# Altium PCB PCB1.PcbDoc
Units mm, origin at the board's own origin, x right, y up, seen from the top; angles counter-clockwise.
Board outline 91.95 x 79.76 mm, 2 copper layers (Top Layer, Bottom Layer); 60 components, 32 nets, 196 pads, 47 vias.
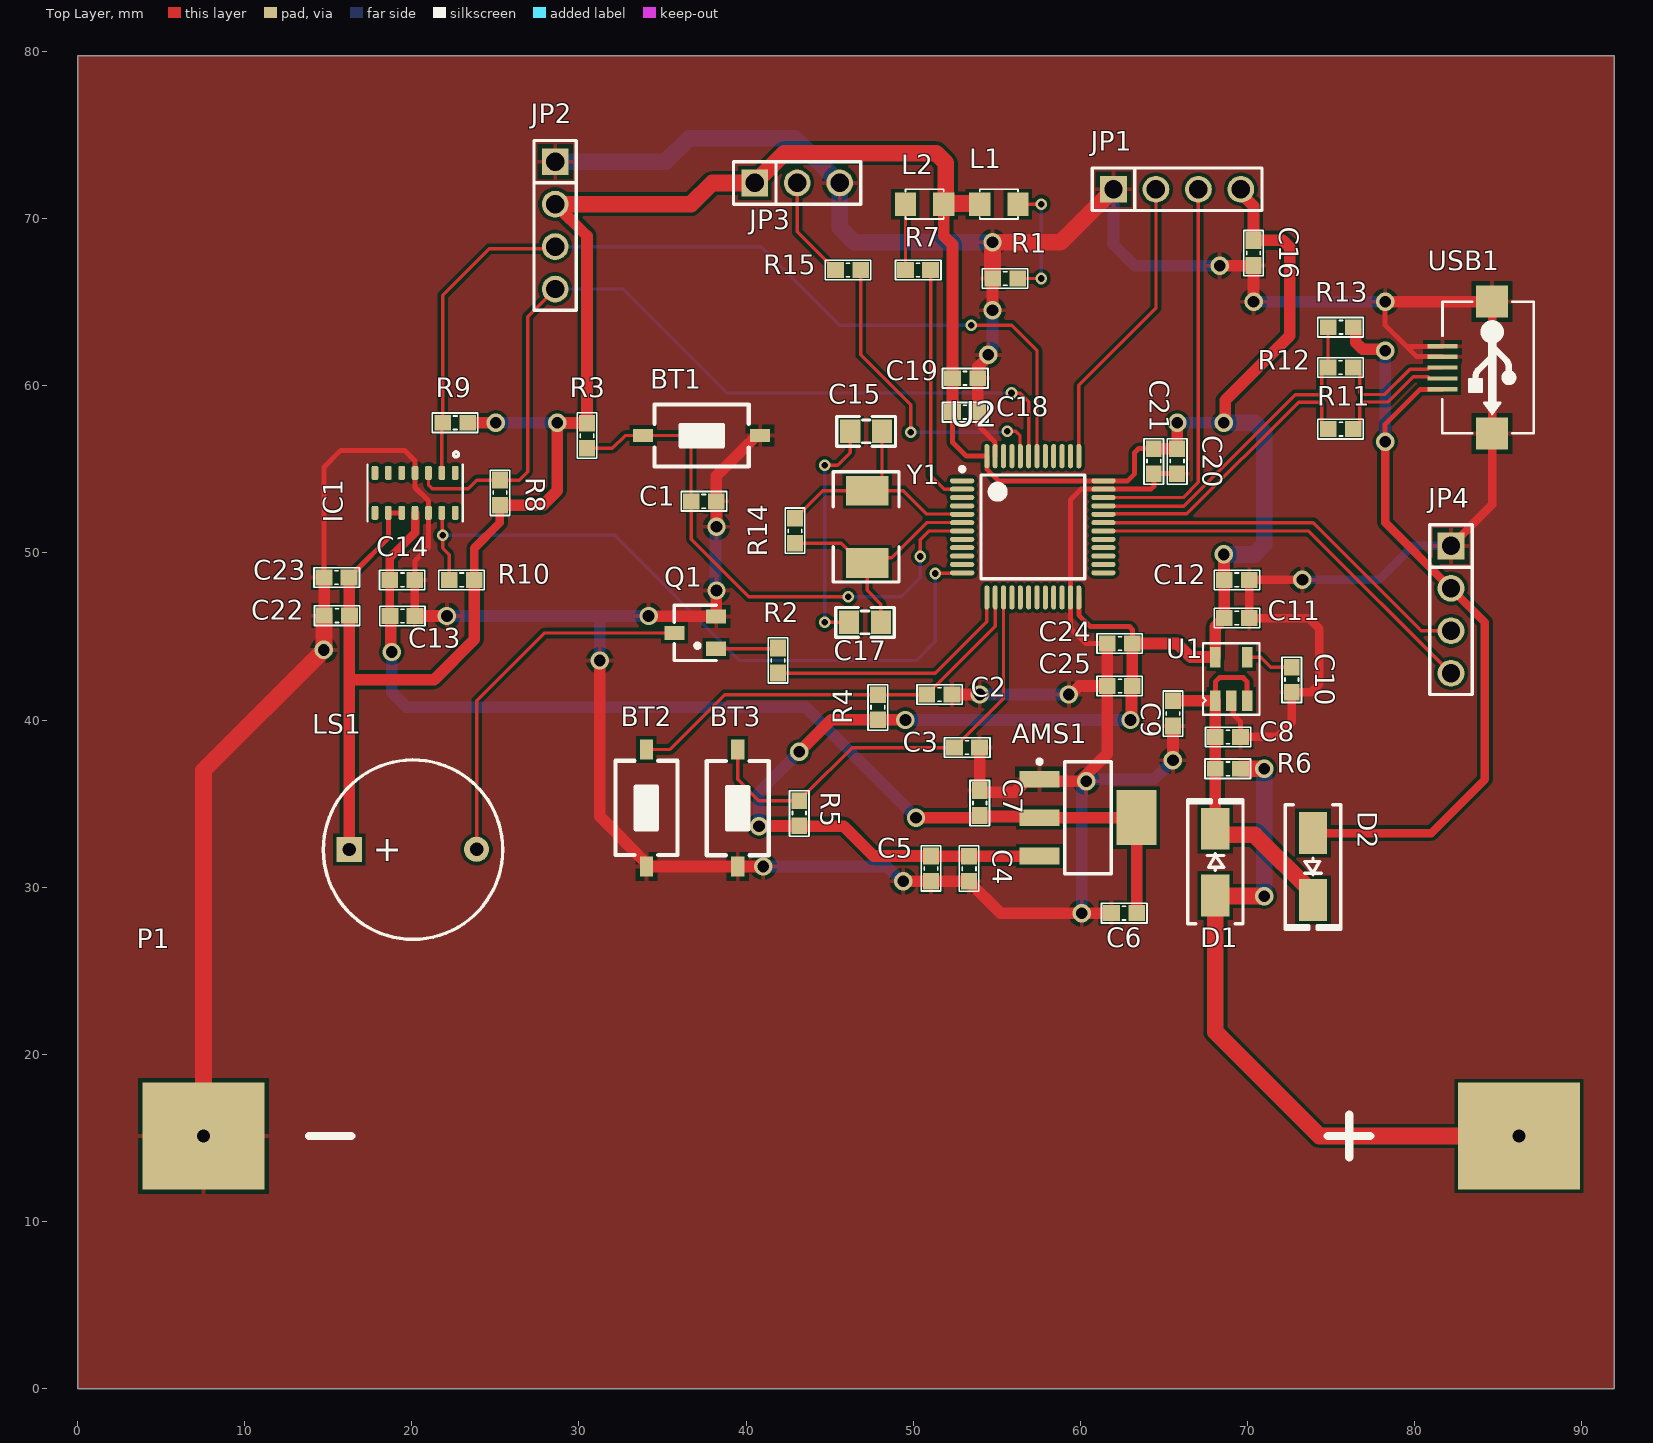
[diagram p0: Top Layer view]
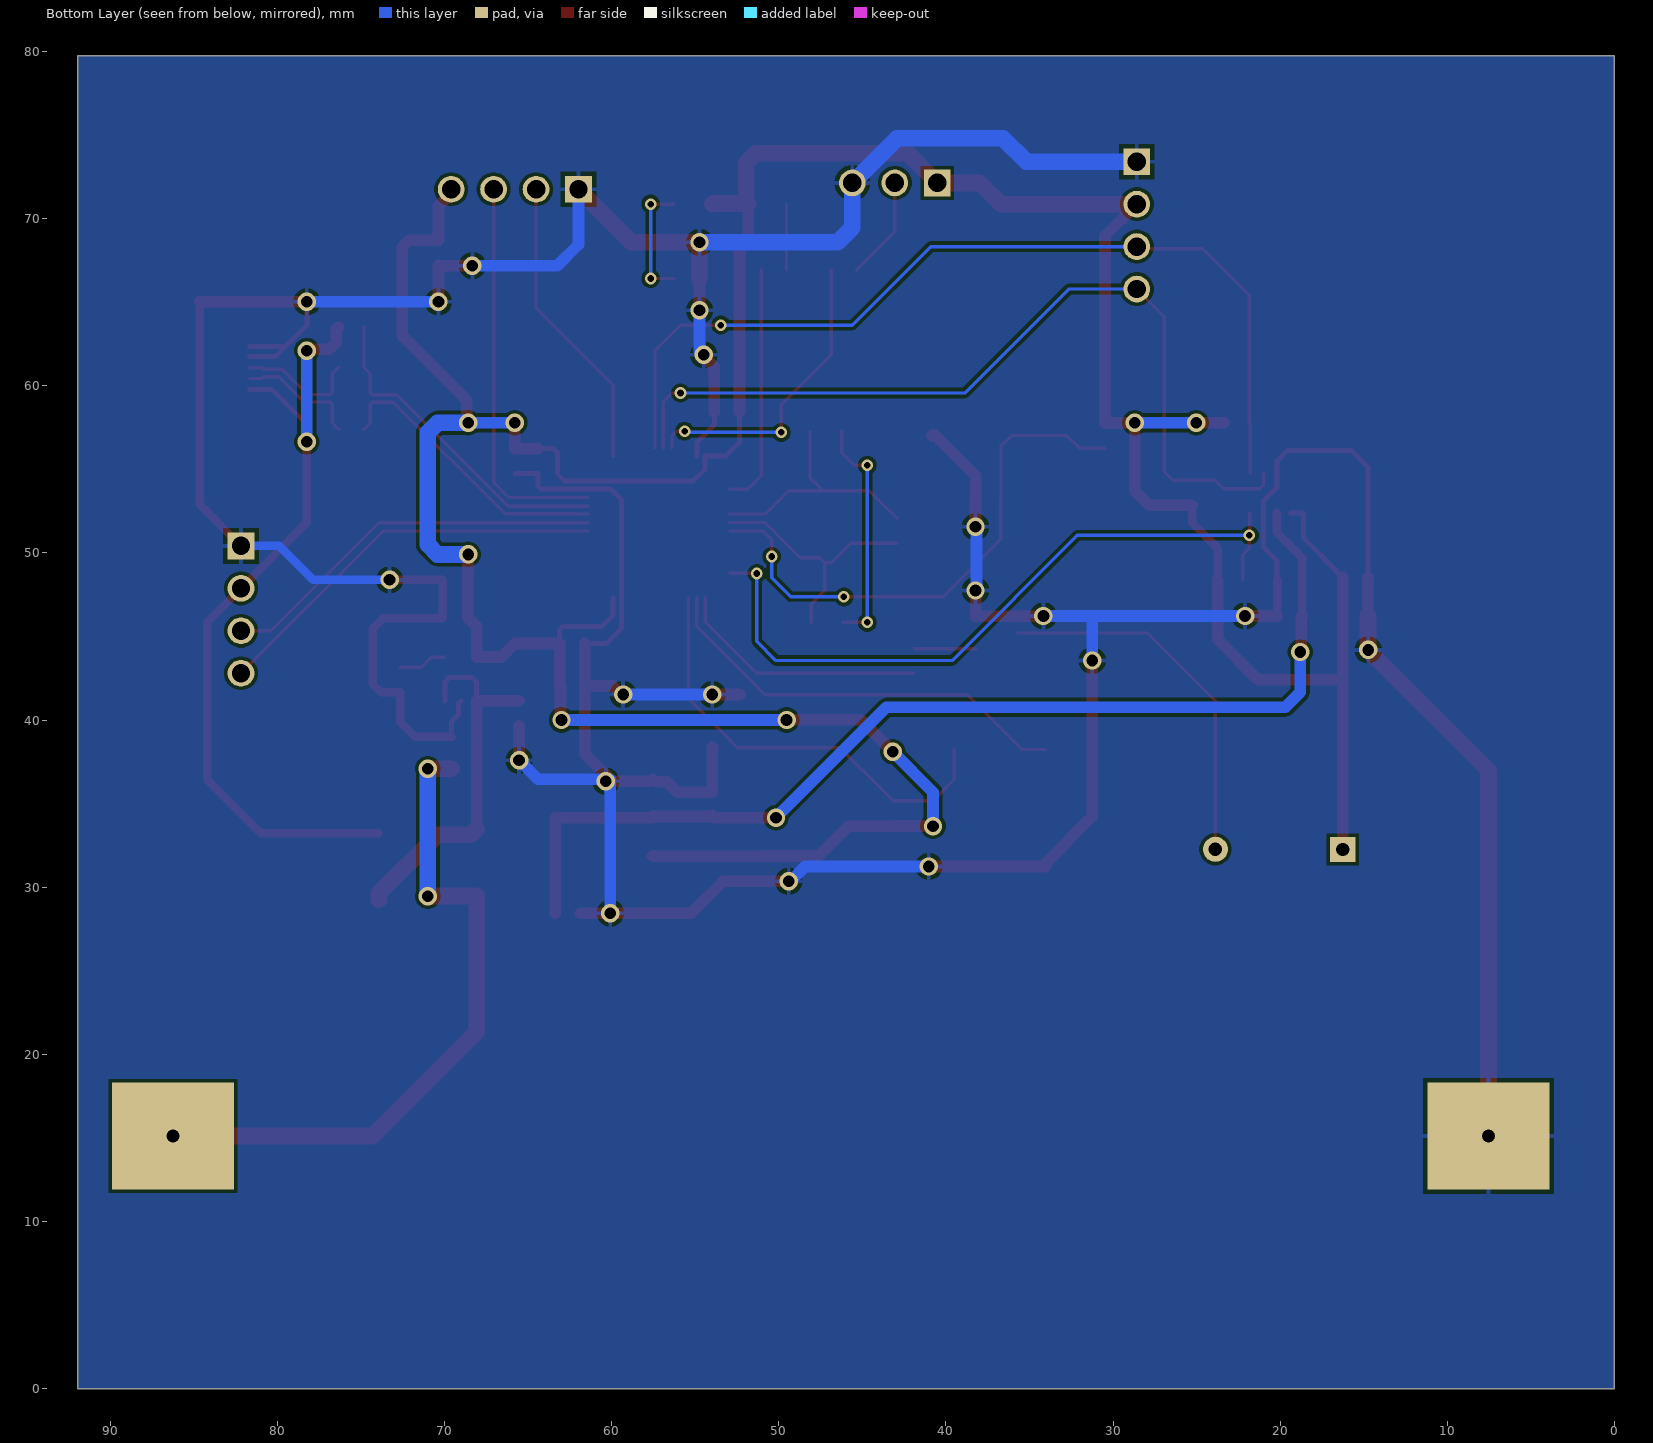
[diagram p1: Bottom Layer view, seen from below]
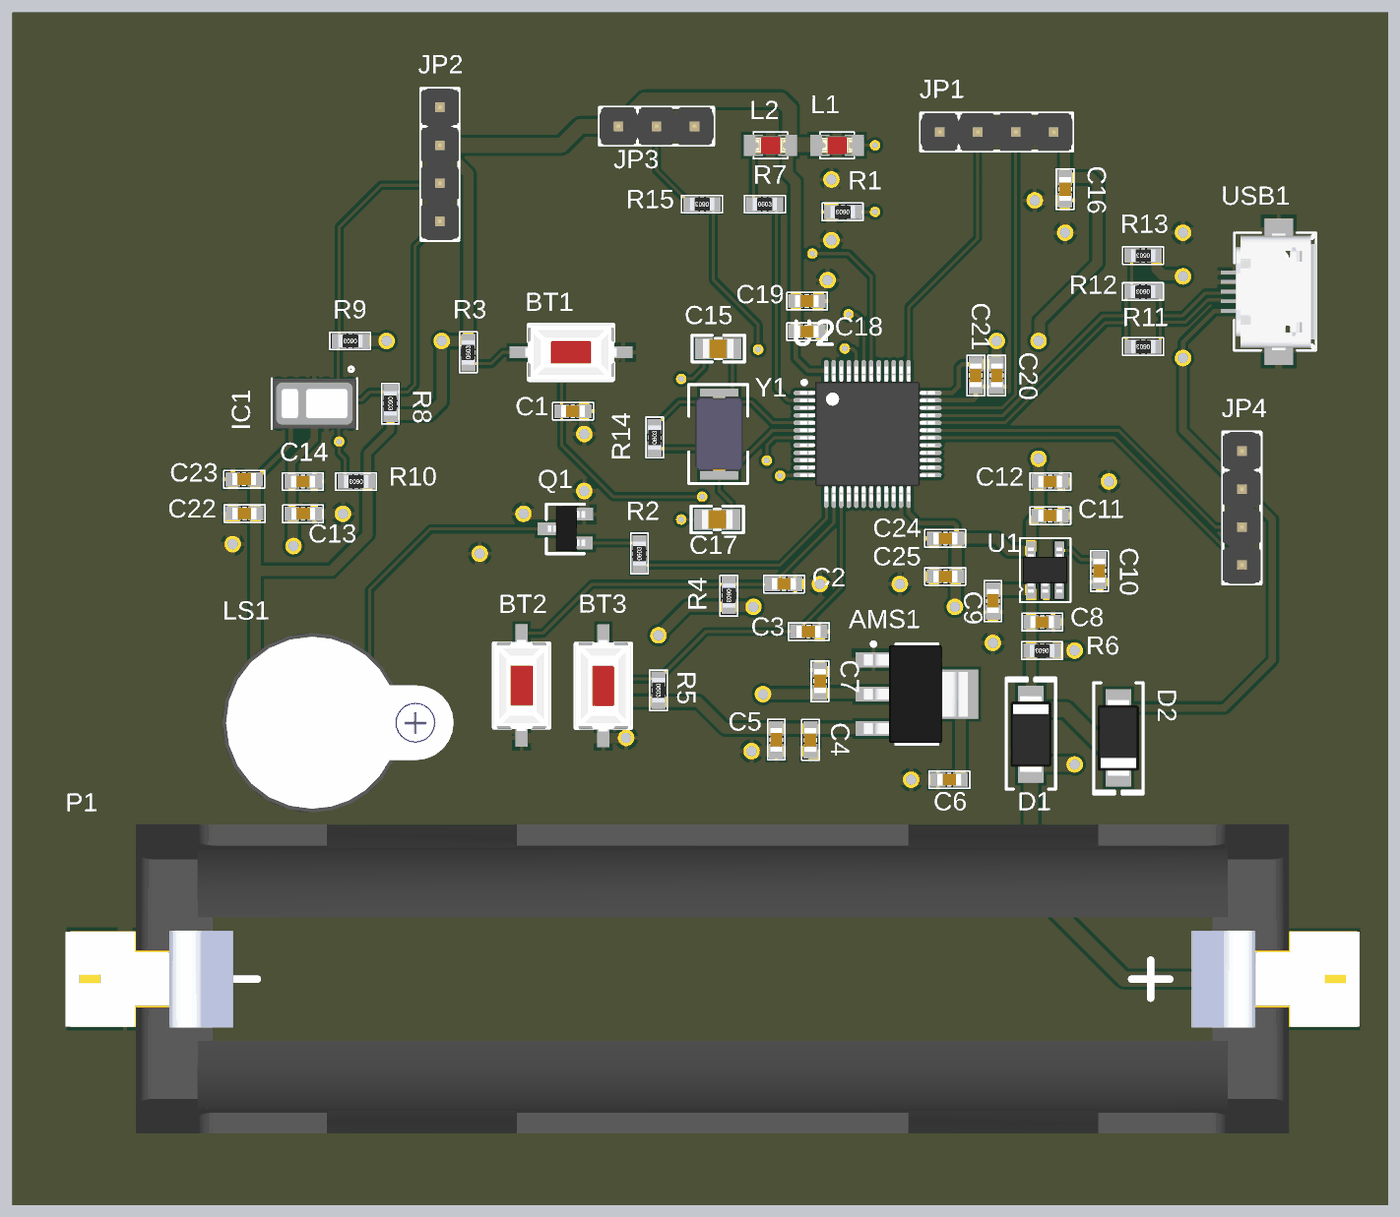
[diagram p2: 3D render of the assembled board from above, using the file's embedded part models]

## Layer stack, top to bottom
Top Solder: solder mask 0.0102, Solder Resist, Dk 3.5
Top Layer: signal copper 0.0356
Dielectric 1: dielectric 0.32, FR-4, Dk 4.8
Bottom Layer: signal copper 0.0356
Bottom Solder: solder mask 0.0102, Solder Resist, Dk 3.5

## Board outline
0,0 0,79.756 91.948,79.756 91.948,0

## Design rules (kind name [scope] priority, off if disabled: settings)
Clearance Clearance_1 [All] p1: gap=0.2 ignorepadtopadclearanceinfootprint=FALSE
DiffPairsRouting [All] p1: maxlimit=0.254 minlimit=0.254 mostfreqgap=0.254 toplayer_minwidth=0.2 toplayer_maxwidth=0.2 toplayer_prefwidth=0.2 bottomlayer_minwidth=0.2 bottomlayer_maxwidth=0.2 bottomlayer_prefwidth=0.2 maxuncoupledlength=12.7
PolygonConnect [All] p1: connectstyle=Relief reliefconductorwidth=0.254 reliefentries=4 polygonreliefangle="90 Angle" airgapwidth=0.254
RoutingVias RoutingVias_Power [InNetClass('Power')] p1: holewidth=0.7 width=1.1 viastyle="Through Hole" minholewidth=0.7 minwidth=1.1 maxholewidth=0.7 maxwidth=1.1
RoutingVias RoutingVias_Signal [All] p2: holewidth=0.4 width=0.7 viastyle="Through Hole" minholewidth=0.4 minwidth=0.7 maxholewidth=0.4 maxwidth=0.7
SolderMaskExpansion [All] p1: expansion=0 istentingtop=FALSE soldermaskfromhole=TRUE
Width Width_Power [InNetClass('Power')] p1: maxlimit=1 minlimit=0.3 preferedwidth=0.7
Width Width_Signal [All] p2: maxlimit=0.2 minlimit=0.2 preferedwidth=0.2
29 further rules are at their usual default settings.

## Classes and differential pairs
net class Power: 5V GND NetD2_1 VCC1V8 VCC3V3 VIN
differential pair USB: +USB_P -USB_N
differential pair USB_D: +USB_D_P -USB_D_N

## Components (designator, comment, footprint, x,y, rotation, side; value= is the part's Value field where it differs from the comment)
AMS1 "AMS1117" SOT223 60.452,34.163 r270 top value="AMS1117-3.3V SOT223"
BT1 "Nut Nhan 2 Chan SMD 3x6x2.5" "Nut Nhan 2 Chan SMD 3x6x2.5" 37.338,57.023 r180 top
BT2 "Nut Nhan 2 Chan SMD 3x6x2.5" "Nut Nhan 2 Chan SMD 3x6x2.5" 34.036,34.742 r90 top
BT3 "Nut Nhan 2 Chan SMD 3x6x2.5" "Nut Nhan 2 Chan SMD 3x6x2.5" 39.497,34.727 r90 top
C1 "105" "tu 0603" 37.465,53.086 r0 top
C2 "105" "tu 0603" 51.562,41.529 r0 top
C3 "105" "tu 0603" 53.213,38.354 r0 top
C4 "104" "tu 0603" 53.34,31.103 r90 top
C5 "106" "tu 0603" 51.054,31.115 r90 top
C6 "104" "tu 0603" 62.611,28.448 r0 top
C7 "106" "tu 0603" 53.975,35.04 r270 top
C8 "105" "tu 0603" 68.822,38.989 r0 top
C9 "104" "tu 0603" 65.532,40.398 r270 top
C10 "22pF" "tu 0603" 72.644,42.418 r270 top
C11 "106" "tu 0603" 69.354,46.101 r0 top
C12 "104" "tu 0603" 69.354,48.387 r0 top
C13 "106" "tu 0603" 19.443,46.228 r180 top
C14 "104" "tu 0603" 19.431,48.387 r180 top
C15 "20pF" "tu 0805" 47.182,57.274 r180 top
C16 "104" "tu 0603" 70.358,67.945 r270 top
C17 "20pF" "tu 0805" 47.117,45.847 r180 top
C18 "104" "tu 0603" 53.098,58.42 r0 top
C19 "104" "tu 0603" 53.098,60.452 r0 top
C20 "104" "tu 0603" 65.786,55.487 r270 top
C21 "104" "tu 0603" 64.389,55.487 r270 top
C22 "104" "tu 0603" 15.518,46.247 r0 top
C23 "106" "tu 0603" 15.494,48.533 r0 top
C24 "104" "tu 0603" 62.357,44.577 r180 top
C25 "104" "tu 0603" 62.357,42.037 r180 top
D1 "M7" "DIODE SMA" 73.914,31.242 r270 top
D2 "M7" "DIODE SMA" 68.072,31.496 r90 top
IC1 "MAX30102" Max30102 20.32,53.721 r270 top
JP1 "SWD" "JP 1x4 DT" 61.976,71.755 r0 top
JP2 "LCD OLED" "JP 1x4 DT" 28.575,73.406 r270 top
JP3 "JP 1x3 2.54" "JP 1x3 DT" 40.513,72.136 r0 top
JP4 "ESP8266" "JP 1x4 DT" 82.169,50.419 r270 top
L1 "LED 0805" LED-0805-Red 53.975,70.866 r0 top
L2 "LED 0805" LED-0805-Red 51.816,70.866 r180 top
LS1 "Coi Chip Speaker" "Coi Chip Speacker" 16.256,32.258 r0 top
P1 "Lithium 18650" 18650_Lithium 86.233,15.113 r180 top
Q1 "HF" SOT-23 36.957,45.212 r90 top value=C9014
R1 "510R" "tro smd 0603" 55.499,66.421 r180 top
R2 "4.7k" "tro smd 0603" 41.91,43.561 r90 top
R3 "10k" "tro smd 0603" 30.48,57.011 r90 top
R4 "10k" "tro smd 0603" 47.879,40.767 r270 top
R5 "10k" "tro smd 0603" 43.18,34.429 r270 top
R6 "1k" "tro smd 0603" 68.822,37.084 r180 top
R7 "510R" "tro smd 0603" 50.28,66.929 r0 top
R8 "1k" "tro smd 0603" 25.273,53.606 r270 top
R9 "1k" "tro smd 0603" 22.594,57.785 r180 top
R10 "1k" "tro smd 0603" 22.987,48.387 r180 top
R11 "20R" "tro smd 0603" 75.577,57.404 r180 top
R12 "20R" "tro smd 0603" 75.565,61.087 r180 top
R13 "4.7k" "tro smd 0603" 75.577,63.5 r180 top
R14 "1M" "tro smd 0603" 42.926,51.32 r90 top
R15 "100k" "tro smd 0603" 46.101,66.929 r180 top
U1 "RT9193-33GB" SOT23-5 69.025,42.458 r0 top
U2 "STM32F103xx_LQFP48" STM32_LQPF48 57.15,51.562 r0 top
USB1 "USB Micro 5p SMD" "USB Micro 5p SMD" 81.661,61.087 r270 top
Y1 "8Mhz" "Thach Anh 2 chan SMD5032" 47.244,51.562 r90 top value=4Mhz

## Footprints (in the part's own frame and the unit in brackets; to place one, negate y for a bottom-side part, rotate by r counter-clockwise, add the part's x,y. Pads: shape width x height; smd on the part's side, far side on the other; paste and mask are expansions set on the pad)
18650_Lithium [mm]
  rect 7.3x6.4 hole 0.762: 1(0,0) 2(78.7,0)
  silkscreen extent 8.89,-1.27 72.39,1.27, body extent -3.79,-10.33 82.67,10.32, height 14.86
"Coi Chip Speacker" [mm]
  rect 1.5x1.5 hole 0.8: 1(0,0)
  round 1.5 hole 0.8: 2(7.62,0.013)
  silkscreen extent -1.55,-5.38 9.18,5.36, body extent -2.22,-6 13.24,6, height 4.5
"DIODE SMA" [mm] "SMA"
  rect 2.5x1.7 smd: 1(-2,0) 2(2,0)
  silkscreen extent -3.68,-1.65 3.75,1.65, body extent -2.6,-1.37 2.6,1.37, height 2.4
"JP 1x3 DT" [mm]
  rect 1.6x1.6 hole 1.1: 1(0,0)
  round 1.6 hole 1.1: 2(2.54,0) 3(5.08,0)
  silkscreen extent -1.27,-1.27 6.35,1.27, body extent -1.27,-1.27 6.35,1.27, height 8.54
"JP 1x4 DT" [mm] "4 pins, 1 row, straight, gold plating"
  rect 1.6x1.6 hole 1.1: 1(0,0)
  round 1.6 hole 1.1: 2(2.54,0) 3(5.08,0) 4(7.62,0)
  silkscreen extent -1.27,-1.27 8.89,1.27, body extent -1.27,-1.27 8.89,1.27, height 8.54
LED-0805-Red [mil]
  rect 50x55 smd: 1(0,0) 2(90,0)
  silkscreen extent 0,-35 90,35, body extent 5,-25 85,25, height 43
Max30102 [mm]
  rrect50% 0.84x0.4 smd: 1(-1.068,2.273) 2(-1.068,1.473) 3(-1.068,0.673) 4(-1.068,-0.127) 5(-1.068,-0.927) 6(-1.068,-1.727) 7(-1.068,-2.527) 8(1.322,-2.527) 9(1.322,-1.727) 10(1.322,-0.927) 11(1.322,-0.127) 12(1.322,0.673) 13(1.322,1.473) 14(1.322,2.273)
  silkscreen extent -2.32,-2.98 1.83,2.72, body extent -1.52,-2.93 1.78,2.67, height 1.65
"Nut Nhan 2 Chan SMD 3x6x2.5" [mm] "Switch SMD type"
  rect 1.2x0.8 smd: 1(-3.5,0) 2(3.5,0)
  silkscreen extent -2.82,-1.85 2.82,1.85, body extent -3.05,-1.85 3.05,1.85, height 2.5
SOT23-5 [mm] "CASE: SOT"
  rect 0.62x1.22 smd mask+0.076: 1(-0.953,-1.31) 2(-0.003,-1.31) 3(0.947,-1.31) 4(0.952,1.31) 5(-0.953,1.31)
  silkscreen extent -1.69,-2.14 1.69,2.14, body extent -1.5,-1.5 1.5,1.5, height 1.41
SOT223 [mm]
  rect 1x2.4 smd: 1(-2.3,-2.9) 2(0,-2.9) 3(2.3,-2.9)
  rect 3.3x2.4 smd: 4(0,2.9)
  silkscreen extent -3.47,-3.02 3.35,1.4, body extent -3.25,-3.56 3.25,3.4, height 1.68
SOT-23 [mm] "SOT 23 _ 1-3-2"
  rect 0.85x1.2 smd: 1(-0.94,-1.245) 2(0.985,-1.25) 3(0.005,1.25)
  silkscreen extent -1.65,-1.27 1.65,1.27, body extent -1.47,-1.33 1.53,1.17, height 1.06
STM32_LQPF48 [mm]
  oval 1.45x0.3 smd: 1(-4.225,2.75) 2(-4.225,2.25) 3(-4.225,1.75) 4(-4.225,1.25) 5(-4.225,0.75) 6(-4.225,0.25) 7(-4.225,-0.25) 8(-4.225,-0.75) 9(-4.225,-1.25) 10(-4.225,-1.75) 11(-4.225,-2.25) 12(-4.225,-2.75) 25(4.225,-2.75) 26(4.225,-2.25) 27(4.225,-1.75) 28(4.225,-1.25) 29(4.225,-0.75) 30(4.225,-0.25) 31(4.225,0.25) 32(4.225,0.75) 33(4.225,1.25) 34(4.225,1.75) 35(4.225,2.25) 36(4.225,2.75)
  oval 0.3x1.45 smd: 13(-2.75,-4.225) 14(-2.25,-4.225) 15(-1.75,-4.225) 16(-1.25,-4.225) 17(-0.75,-4.225) 18(-0.25,-4.225) 19(0.25,-4.225) 20(0.75,-4.225) 21(1.25,-4.225) 22(1.75,-4.225) 23(2.25,-4.225) 24(2.75,-4.225) 37(2.75,4.225) 38(2.25,4.225) 39(1.75,4.225) 40(1.25,4.225) 41(0.75,4.225) 42(0.25,4.225) 43(-0.25,4.225) 44(-0.75,4.225) 45(-1.25,4.225) 46(-1.75,4.225) 47(-2.25,4.225) 48(-2.75,4.225)
  silkscreen extent -4.35,-3.1 3.1,3.57, body extent -4.5,-4.5 4.5,4.5, height 1.6
"Thach Anh 2 chan SMD5032" [mil] "DO-214-AA/SMB; 2 C-Bend Leads; Body 5.3 x 3.6 mm, inc. leads (LxW)"
  rect 70x100 smd: 1(-85,0) 2(85,0)
  silkscreen extent -130,-75 130,80, body extent -98,-63 98,63, height 51
"tro smd 0603" [mm] "Chip Capacitor, 2-Leads, Body 1,60x0,80mm, IPC Medium Density"
  rect 1x0.95 smd mask+0.076: 1(-0.75,0) 2(0.75,0)
  silkscreen extent -1.35,-0.58 1.37,0.58, body extent -0.82,-0.42 0.82,0.43, height 0.44
"tu 0603" [mm] "Chip Capacitor, 2-Leads, Body 1,60x0,80mm, IPC Medium Density"
  rect 1x0.95 smd mask+0.076: 1(-0.75,0) 2(0.75,0)
  silkscreen extent -1.35,-0.58 1.37,0.58, body extent -0.8,-0.4 0.8,0.4, height 0.9
"tu 0805" [mm] "Compoment SMD 80x50mil"
  rect 1.2x1.4 smd: 1(-0.946,-0.003) 2(0.954,-0.003)
  silkscreen extent -1.75,-0.89 1.75,0.89, body extent -1.01,-0.64 1.01,0.63, height 0.61
"USB Micro 5p SMD" [mil]
  rect 10x70 smd: 1(51.18,0) 2(25.59,0) 3(0,0) 4(-25.59,0) 5(-50,0)
  rect 74.8x74.8 smd: 5(-155.51,116.84) 5(155.51,116.84)
  silkscreen extent -155,-1 155,215, body extent -157,5 158,218, height 107

## Part data
AMS1: library part "AMS1117 SMD", "Dán", Chung_Loai=Dán, Don_Vi=Con, Ma_Hang=MH000596
C1 C2 C3: library part "Tu 0603 105 50V 10%", "Dán", Chung_Loai=Dán, Don_Vi=Con, Ma_Hang=MH004569, So_Chan=2, Ten_Linh_Kien="Tụ 0603 105-1uF 50V 10%"
C4 C6 C9 C12 C14 C16 C18 C19 C20 C21 C22 C24 C25: library part "Tu 0603 104 50V 10%", "Dán", Chung_Loai=Dán, Don_Vi=Con, Ma_Hang=MH004568, So_Chan=2, Ten_Linh_Kien="Tụ 0603 104-100nF 10% 50V"
C5 C7 C11 C13 C23: library part "Tu 0603 106 16V 20%", "Dán", Chung_Loai=Dán, Don_Vi=Con, Ma_Hang=MH004848, So_Chan=2, Ten_Linh_Kien="Tụ 0603-10uF 20% 16V"
C8: library part "Tu 0603 105 16V 20%", "Dán", Chung_Loai=Dán, Don_Vi=Con, Ma_Hang=MH004574, So_Chan=2, Ten_Linh_Kien="Tụ 0603 105-1uF 20% 16V"
C10: library part "Tu 0603 22pF 50V 10%", "Dán", Chung_Loai=Dán, Don_Vi=Con, Ma_Hang=MH004570, So_Chan=2, Ten_Linh_Kien="Tụ 0603 22pF 50V 10%"
C15 C17: library part "Tu 0805 20pF 50V 10%", "Dán", Chung_Loai=Dán, Don_Vi=Con, Ma_Hang=MH004558, So_Chan=2, Ten_Linh_Kien="Tụ 0805 20P 10% 50V"
D1 D2: library part "Diode M7 ( 4007 )", "Dán", Chung_Loai=Dán, Don_Vi=Con, Ma_Hang=MH000944, Ten_Linh_Kien="Diode M7 1N4007 SMD 1A 1000V"
JP1 JP2 JP4: library part "JP 1x4 2.54 Duc Thang", "Cắm", Chung_Loai=Cắm, Don_Vi=Con, Ma_Hang=MH000903, Ten_Linh_Kien="Jump Đơn Đực 2.54MM 1x40P Thẳng 11MM"
JP3: library part "JP 1x3 2.54 Duc Thang", "Cắm", Chung_Loai=Cắm, Don_Vi=Con, Ma_Hang=MH000903, Ten_Linh_Kien="Jump Đơn Đực 2.54MM 1x40P Thẳng 11MM"
L1 L2: library part "LED 0805 Do", "Dán", Chung_Loai=Dán, Don_Vi=Con, Ma_Hang=MH000897, Ten_Linh_Kien="LED 0805 Màu Đỏ (Red)"
LS1: "Còi chip"
Q1: library part "Trans C1815 HF SMD", "SOT-23"
R1 R7: library part "Tro 0603 5% 510R", "Dán", Chung_Loai=Dán, Don_Vi=Con, Ma_Hang=MH007667, So_Chan=2, Ten_Linh_Kien="Trở 0603 5% 510R"
R2 R8 R9 R10 R13: library part "Tro 0603 5% 4.7k", "Dán", Chung_Loai=Dán, Don_Vi=Con, Ma_Hang=MH006327, So_Chan=2, Ten_Linh_Kien="Trở 0603 5% 4.7k"
R3 R4 R5: library part "Tro 0603 1% 10k", "Dán", Chung_Loai=Dán, Don_Vi=Con, Ma_Hang=MH006333, So_Chan=2, Ten_Linh_Kien="Trở 0603 1% 10k"
R6: library part "Tro 0603 5% 1k", "Dán", Chung_Loai=Dán, Don_Vi=Con, Ma_Hang=MH006319, So_Chan=2, Ten_Linh_Kien="Trở 0603 5% 1k"
R11 R12: library part "Tro 0603 5% 22R", "Dán", Chung_Loai=Dán, Don_Vi=Con, Ma_Hang=MH006331, So_Chan=2, Ten_Linh_Kien="Trở 0603 5% 22R"
R14: library part "Tro 0603 5% 1M", "Dán", Chung_Loai=Dán, Don_Vi=Con, Ma_Hang=MH006909, So_Chan=2, Ten_Linh_Kien="Trở 0603 5% 1M"
R15: library part "Tro 0603 5% 100k", "Dán", Chung_Loai=Dán, Don_Vi=Con, Ma_Hang=MH006314, So_Chan=2, Ten_Linh_Kien="Trở 0603 5% 100k"
U1: library part REG_5.5V-3.3V-0.3A-1W-SOT-23-5, "Linear Voltage Regulator IC 1 Output 300mA SOT-23-5", Alternate Part Number-1=NA, Case/Package=SOT-23-5, Manufacturer="Richtek USA Inc.", Supplier Part Number-1=C15651, Manufacturer Part Number=RT9193-33GB, Supplier-1=LCSC
USB1: "USB Type B", Ma_Hang=MH001020, Ten="MicroUSB MK5P SMD"
Y1: library part "Thach Anh 2 chan SMD 5032", "Crystal For all Crystal 2pin."
BT1 BT2 BT3: Ma_Hang=MH001036, Ten="Nút Nhấn 2 Chân 3x6x2.5MM SMD"
U2: ComponentLink1Description="Manufacturer Link", ComponentLink1URL=www.st.com/stm32, ComponentLink2Description=Datasheet, ComponentLink2URL=http://www.st.com/stonline/products/literature/ds/13587.pdf, DatasheetVersion="rev6, Mar-2008", PackageDescription="48-Pin Low-Profile Quad Flat Pack, 7 x 7 mm Body, 0.5 mm Pitch (LQFP48)", PackageReference=LQFP48, PackageVersion=Mar-2008, Published=30-May-2008, Publisher="Altium Limited"

## Via types
v1: diameter 1.1, hole 0.7, Top Layer to Bottom Layer, 35 vias
v2: diameter 0.7, hole 0.4, Top Layer to Bottom Layer, 12 vias

## Nets (pads, with @x,y where several pads share a name; then routed paths per layer and width w, separated by ;. In a path a pad name is that pad's centre, name@x,y a point inside that pad or via, vN(x,y) a via of type N, cw(c..) or ccw(c..) an arc to the next point about the centre after c; other vN are vias at no path point)
5V: D1.1 JP4.2 R13.1 USB1.1 | length 48.3
  Top Layer w0.3: v1(78.232,56.642) 78.232,57.697 80.322,59.787 USB1.1
  Top Layer w0.508: D1.1 80.994,33.242 84.201,36.449 84.201,45.847 JP4.2 78.232,51.816 v1(78.232,56.642)
  Top Layer w0.7: R13.1 76.352,63.5 76.477,63.375 76.477,62.59 76.887,62.18 78.155,62.18 v1(78.232,62.103)
  Bottom Layer w0.508: JP4.2@81.96,47.67 JP4.2
  Bottom Layer w0.7: v1(78.232,56.642) v1(78.232,62.103)
BOOT0: R15.1 U2.44 | length 18.4
  Top Layer w0.2: R15.1 46.851,61.861 49.847,58.864 v2(49.847,57.213) ; v2(55.626,57.277) 55.632,57.271 56.14,57.271 56.381,57.03 56.381,56.314 U2.44@56.4,56.295
  Bottom Layer w0.2: v2(49.847,57.213) 55.562,57.213 v2(55.626,57.277)
BUZZER: R2.1 U2.13 | length 15.2
  Top Layer w0.2: R2.1 41.922,42.799 51.308,42.799 54.4,45.891 U2.13
GND: AMS1.1 BT1.1 BT2.1 BT3.1 C1.2 C2.2 C3.2 C4.1 C5.1 C6.1 C7.1 C8.2 C9.2 C10.2 C11.2 C12.2 C13.1 C14.1 C16.2 C18.2 C19.2 C20.2 C21.2 C22.1 C23.1 C24.2 C25.2 IC1.4 IC1.12 JP1.1 JP2.1 JP3.3 JP4.1 P1.2 Q1.2 R1.2 U1.2 U2.23 U2.35 U2.47 USB1.4 USB1.5 | length 333
  Top Layer w0.3: C23.1 14.744,55.13 15.748,56.134 19.558,56.134 20.193,55.499 IC1.4 20.193,53.919 20.993,53.119 IC1.12 20.993,50.33 20.181,49.518 C14.1 ; C18.2 53.848,57.658 54.9,56.606 U2.47 ; C24.2 60.325,44.577 59.4,45.502 U2.23 59.4,53.177 60.035,53.812 U2.35 64.213,53.812 64.389,53.988 C21.2 C20.2 ; U1.2 69.152,41.018 69.152,40.322 69.572,39.902 C8.2 ; v1(78.232,65.024) 78.232,63.627 79.502,62.357 ; USB1.4 80.122,61.737 79.502,62.357 ; USB1.5@81.661,62.357 79.502,62.357
  Top Layer w0.508: C14.1 20.187,48.381 20.187,46.234 C13.1 ; C8.2 71.755,38.989 72.644,39.878 C10.2 73.799,41.668 74.295,42.164 74.295,45.466 73.66,46.101 C11.2 C12.2 v1(73.279,48.387) ; JP4.1 84.629,52.879 84.629,57.137 USB1.5@84.629,65.037
  Top Layer w0.7: C23.1 14.756,48.521 C22.1@14.756,46.259 ; C13.1 v1(22.098,46.228) ; v1(31.242,43.561) 31.242,34.236 34.036,31.442 BT2.1 34.044,31.234 39.489,31.234 BT3.1 39.505,31.234 41.013,31.234 v1(41.021,31.242) ; v1(34.163,46.228) 34.178,46.213 38.192,46.213 Q1.2 38.217,46.207 38.217,47.742 v1(38.227,47.752) ; v1(38.227,51.562) 38.221,51.568 38.221,53.08 C1.2 38.215,54.6 40.638,57.023 BT1.1 ; v1(49.403,30.353) 49.409,30.359 51.054,30.359 53.334,30.359 53.334,30.334 55.22,28.448 v1(60.071,28.448) C6.1 ; C2.2 v1(53.975,41.529) ; C18.2 C19.2 53.873,60.452 53.873,61.131 54.483,61.741 v1(54.483,61.849) ; C3.2 53.963,38.235 53.969,38.229 53.969,35.681 53.975,35.675 54.088,35.675 54.1,35.687 56.076,35.687 56.702,36.313 57.402,36.313 AMS1.1 ; v1(54.737,64.516) 54.743,64.522 54.743,66.415 R1.2 ; AMS1.1@57.806,36.336 v1(60.339,36.336) ; v1(59.309,41.529) 59.417,41.529 59.925,42.037 C25.2 ; v1@60.085,36.463 61.595,37.973 61.595,42.025 C25.2 ; C24.2 C25.2 ; v1(65.532,37.592) C9.2 ; v1(68.326,67.183) 68.332,67.189 70.352,67.189 C16.2 v1(70.358,65.024) ; v1(78.232,65.024) 78.239,65.031 84.622,65.031 USB1.5@84.629,65.037
  Top Layer w1: P1.2 7.533,36.997 v1(14.732,44.196) 14.743,44.207 14.743,46.246 C22.1@14.756,46.259 ; R1.2 54.737,66.433 v1(54.737,68.58) 58.801,68.58 JP1.1
  Bottom Layer w0.508: v1(73.279,48.387) 77.851,48.387 79.883,50.419 JP4.1
  Bottom Layer w0.7: v1(22.098,46.228) 31.242,46.228 ; v1(31.242,43.561) 31.242,46.228 ; v1@34.036,46.228 31.242,46.228 ; v1@38.1,47.752 38.163,47.816 38.163,51.498 v1(38.227,51.562) ; v1(41.021,31.242) 48.406,31.242 49.295,30.353 v1(49.403,30.353) ; v1(53.975,41.529) v1(59.309,41.529) ; v1@54.483,61.722 v1(54.483,61.849) 54.737,62.103 v1(54.737,64.516) ; v1(60.071,28.448) 60.078,28.455 60.078,36.456 60.085,36.463 64.398,36.463 65.527,37.592 v1(65.532,37.592) ; JP1.1 61.976,68.453 63.246,67.183 v1(68.326,67.183) ; v1(70.358,65.024) v1(78.232,65.024)
  Bottom Layer w1: JP2.1 35.179,73.406 36.576,74.803 42.926,74.803 JP3.3 45.593,69.469 46.482,68.58 v1(54.737,68.58)
INT: IC1.13 R10.2 U2.12 | length 42.9
  Top Layer w0.2: IC1.13 21.819,52.373 21.819,51.079 v2(21.844,51.054) 21.844,50.292 22.237,49.899 R10.2 ; v2(51.308,48.768) 51.333,48.793 52.906,48.793 U2.12
  Bottom Layer w0.2: v2(21.844,51.054) 32.131,51.054 39.624,43.561 50.165,43.561 51.308,44.704 v2(51.308,48.768)
NetC10_1: C10.1 U1.4 | length 2.9
  Top Layer w0.2: U1.4 70.786,43.768 71.386,43.168 C10.1
NetC15_2: C15.2 C17.2 | length 14
  Top Layer w0.2: v2(44.704,45.847) 46.159,45.847 C17.2 ; v2(44.704,55.245) 45.466,55.245 46.228,56.007 C15.2
  Bottom Layer w0.2: v2(44.704,45.847) v2(44.704,55.245)
NetD2_1: D2.1 P1.1 R6.1 | length 40.9
  Top Layer w1: R6.1 v1(70.993,37.084) ; v1(70.993,29.464) 70.977,29.48 68.088,29.48 D2.1 68.072,21.336 74.295,15.113 P1.1
  Bottom Layer w1: v1(70.993,29.464) v1(70.993,37.084)
NetJP3_2: JP3.2 R15.2 | length 6.2
  Top Layer w0.2: JP3.2 43.053,69.202 45.326,66.929 R15.2
NetL1_2: L1.2 R1.1 | length 7.3
  Top Layer w0.2: R1.1 v2(57.658,66.421) ; L1.2 v2(57.658,70.866)
  Bottom Layer w0.2: v2(57.658,66.421) v2(57.658,70.866)
NetL2_2: L2.2 R7.1 | length 3.9
  Top Layer w0.2: R7.1 L2.2
NetLS1_2: LS1.2 Q1.3 | length 22.4
  Top Layer w0.2: LS1.2 23.876,41.148 27.94,45.212 35.702,45.212 Q1.3
NetQ1_1: Q1.1 R2.2 | length 3.7
  Top Layer w0.2: Q1.1 41.871,44.272 R2.2
OSC_IN: C15.1 R14.2 U2.5 Y1.2 | length 15.2
  Top Layer w0.2: R14.2 42.926,52.095 43.301,52.47 43.326,52.47 44.577,53.721 Y1.2 Y1.2@47.339,53.721 ; C15.1 48.128,54.51 Y1.2@47.339,53.721 ; U2.5 52.913,52.324 50.8,52.324 49.403,53.721 Y1.2@47.339,53.721
OSC_OUT: C17.1 R14.1 U2.6 Y1.1 | length 15.4
  Top Layer w0.2: R14.1 45.696,50.57 46.863,49.403 Y1.1 ; C17.1 48.063,46.933 47.244,47.752 Y1.1 ; U2.6 52.921,51.816 50.8,51.816 48.697,49.713 47.554,49.713 Y1.1
PA4: BT2.2 C2.1 R4.1 U2.14 | length 25.7
  Top Layer w0.2: BT2.2 35.448,38.242 38.723,41.517 R4.1 50.8,41.517 C2.1 50.837,41.529 51.212,41.904 51.212,41.929 54.9,45.617 U2.14
PA5: BT3.2 C3.1 R5.1 U2.15 | length 26.8
  Top Layer w0.2: BT3.2 39.497,36.449 40.767,35.179 R5.1 43.18,35.204 43.555,35.579 43.58,35.579 46.343,38.342 52.451,38.342 C3.1 52.488,38.354 52.863,38.729 52.863,38.754 55.4,41.291 U2.15
PC13: R7.2 U2.2 | length 14.5
  Top Layer w0.2: R7.2 51.054,66.905 51.054,54.61 51.852,53.812 U2.2
RESET: BT1.2 C1.1 R3.1 U2.7 | length 33
  Top Layer w0.2: R3.1 32.004,56.261 32.766,57.023 BT1.2 36.068,57.023 36.703,56.388 36.703,53.098 C1.1 36.715,50.812 40.156,47.371 v2(46.101,47.371) ; v2(50.419,49.784) 50.419,50.8 50.927,51.308 52.921,51.308 U2.7
  Bottom Layer w0.2: v2(46.101,47.371) 49.276,47.371 50.419,48.514 v2(50.419,49.784)
RX: JP4.3 U2.31 | length 23.5
  Top Layer w0.2: U2.31@61.379,51.816 U2.31 73.91,51.812 73.914,51.816 80.391,45.339 JP4.3
SCL: IC1.2 JP2.3 R9.2 U2.42 | length 55.8
  Top Layer w0.2: IC1.2 21.793,57.734 R9.2 21.844,65.405 24.638,68.199 28.448,68.199 JP2.3 ; v2(53.467,63.627) 55.88,63.627 57.404,62.103 57.404,56.299 U2.42@57.4,56.295
  Bottom Layer w0.2: JP2.3 40.894,68.326 45.593,63.627 v2(53.467,63.627)
SDA: IC1.3 JP2.4 R8.1 U2.43 | length 52.6
  Top Layer w0.2: IC1.3 20.993,54.064 21.209,53.848 23.368,53.848 23.876,54.356 R8.1 26.416,54.356 26.924,54.864 26.924,64.135 JP2.4 ; v2(55.88,59.563) 55.886,59.557 56.393,59.557 56.756,59.194 ; 56.757,59.194 56.898,59.053 56.898,56.297 U2.43@56.9,56.295
  Bottom Layer w0.2: JP2.4 32.639,65.786 38.862,59.563 v2(55.88,59.563)
SWDCLK: JP1.2 U2.37 | length 17.9
  Top Layer w0.2: U2.37 59.9,60.027 64.516,64.643 JP1.2
SWDIO: JP1.3 U2.34 | length 23.6
  Top Layer w0.2: U2.34 66.139,53.312 67.056,54.229 JP1.3
TX: JP4.4 U2.30 | length 24.3
  Top Layer w0.2: U2.30 61.379,51.308 73.66,51.308 JP4.4
USB_D_N: R11.2 U2.32 | length 17.5
  Top Layer w0.2: U2.32 61.394,52.331 62.04,52.331 62.044,52.335 66.37,52.335 73.047,59.013 74.31,59.013 74.427,58.895 74.427,57.779 74.802,57.404 R11.2
USB_D_P: R12.2 R13.2 U2.33 | length 20
  Top Layer w0.2: U2.33 61.394,52.793 62.04,52.793 62.044,52.789 66.182,52.789 72.859,59.467 74.31,59.467 74.427,59.584 74.427,60.712 74.802,61.087 R12.2 74.815,63.488 R13.2
USB_N: R11.1 USB1.2 | length 7.3
  Top Layer w0.2: R11.1 76.34,57.404 76.715,57.779 76.715,58.907 76.832,59.024 78.394,59.024 79.904,60.535 80.801,60.535 80.899,60.437 USB1.2
USB_P: R12.1 USB1.3 | length 7.3
  Top Layer w0.2: R12.1 76.34,61.087 76.715,60.712 76.715,59.596 76.832,59.478 78.206,59.478 79.716,60.989 80.801,60.989 80.899,61.087 USB1.3
VCC1V8: AMS1.2 AMS1.4 C6.2 C7.2 C13.2 C14.2 IC1.11 | length 64.9
  Top Layer w0.508: C13.2 18.687,46.234 18.687,48.381 C14.2 18.681,49.691 20.193,51.203 IC1.11
  Top Layer w0.7: C13.2 18.744,46.176 18.744,44.121 v1(18.796,44.069) ; v1@50.171,34.169 v1(50.165,34.163) 53.85,34.163 53.975,34.288 C7.2 54.038,34.227 AMS1.2@57.552,34.227 ; AMS1.2 AMS1.4 63.361,34.154 C6.2
  Bottom Layer w0.7: v1(18.796,44.069) 18.796,41.656 19.685,40.767 43.561,40.767 v1(50.165,34.163)
VCC3V3: AMS1.3 C4.2 C5.2 C11.1 C12.1 C16.1 C18.1 C19.1 C20.1 C21.1 C22.2 C23.2 C24.1 C25.1 IC1.9 IC1.10 JP1.4 JP2.2 JP3.1 L1.1 L2.1 LS1.1 R3.2 R4.2 R5.2 R8.2 R9.1 R10.1 U1.5 U2.24 U2.36 U2.48 | length 227.9
  Top Layer w0.3: C23.2 16.256,48.533 16.269,48.533 16.594,48.858 16.594,48.883 18.593,50.882 IC1.9 IC1.10 ; C18.1 52.348,56.618 53.179,55.787 54.019,55.787 U2.48 54.4,55.005 55.093,54.312 U2.36 62.821,54.312 63.246,54.737 63.246,56.007 63.476,56.237 C21.1 ; U2.24 59.9,46.272 60.579,45.593 62.931,45.593 63.107,45.417 C24.1
  Top Layer w0.508: R10.1 23.737,50.28 25.273,51.816 R8.2
  Top Layer w0.7: LS1.1 16.256,42.418 ; C23.2@16.256,48.533 16.256,46.247 16.256,42.418 ; R9.1 v1(25.019,57.785) ; R10.1 23.737,44.819 21.336,42.418 16.256,42.418 ; R8.2 27.837,52.856 28.702,53.721 v1(28.702,57.785) 28.714,57.773 30.468,57.773 R3.2 30.48,68.961 JP2.2 ; v1(40.767,33.655) 40.779,33.667 43.192,33.667 43.204,33.655 45.847,33.655 47.637,31.865 C5.2 51.06,31.859 53.334,31.859 C4.2 53.345,31.858 57.547,31.858 AMS1.3 ; v1(43.18,38.1) 45.097,40.017 R4.2 47.885,40.011 49.524,40.011 v1(49.53,40.005) ; L2.1 51.816,68.961 52.348,68.429 C19.1 C18.1 ; v1(62.992,40.005) 63.05,40.063 63.05,41.979 C25.1 C24.1 65.786,44.577 66.595,43.768 U1.5 68.072,45.594 68.579,46.101 C11.1 C12.1 68.592,48.399 68.592,49.899 v1(68.58,49.911) ; C21.1 C20.1 v1(65.786,57.785) ; v1(68.58,57.785) 68.657,57.862 68.657,59.132 72.517,62.992 72.517,68.297 72.107,68.707 70.37,68.707 C16.1 70.358,70.749 69.596,71.511 JP1.4
  Top Layer w1: JP2.2 36.703,70.866 37.973,72.136 JP3.1 42.291,73.914 51.357,73.914 51.943,73.328 L2.1@51.943,70.993 ; L2.1 L2.1@51.943,70.993 ; L1.1 53.936,70.905 51.951,70.905 51.943,70.913 L2.1@51.943,70.993
  Bottom Layer w0.7: v1(25.019,57.785) v1(28.702,57.785) ; v1(40.767,33.655) 40.767,35.687 v1(43.18,38.1) ; v1(49.53,40.005) v1(62.992,40.005) ; v1(65.786,57.785) v1(68.58,57.785)
  Bottom Layer w1: v1(68.58,49.911) 70.407,49.911 70.993,50.497 70.993,57.199 70.407,57.785 v1(68.58,57.785)
VIN: C8.1 C9.1 D1.2 D2.2 R6.2 U1.1 U1.3 | length 22.4
  Top Layer w0.3: U1.1 68.072,42.291 68.326,42.545 69.723,42.545 69.849,42.419 69.972,42.296 U1.3
  Top Layer w0.7: C9.1 U1.1 C8.1 R6.2 D2.2
  Top Layer w1: D2.2 68.072,33.484 68.422,33.134 70.422,33.134 73.914,29.642 D1.2
pads on no net: IC1.1 IC1.5 IC1.6 IC1.7 IC1.8 IC1.14 U2.1 U2.3 U2.4 U2.8 U2.9 U2.10 U2.11 U2.16 U2.17 U2.18 U2.19 U2.20 U2.21 U2.22 U2.25 U2.26 U2.27 U2.28 U2.29 U2.38 U2.39 U2.40 U2.41 U2.45 U2.46

## Polygon pours and split planes (outlines as drawn)
GND on Bottom Layer "GND_L02_P001" (solid, pour order 1): 0,79.756 0,0 91.948,0 91.948,79.756
GND on Top Layer "GND_L01_P000" (solid, pour order 0): 0,79.756 0,0 91.948,0 91.948,79.756

## Silkscreen, mask and mechanical layers (free items; w line width, h text height)
Mechanical 1:
  the board outline again, w1

## Text inside footprints (layer, text, board x,y; h text height)
LS1: Top Overlay "+" at 17.666,31.547 h1.52